# Altium PCB PCB1.PcbDoc
Units mm, origin at the board's own origin, x right, y up, seen from the top; angles counter-clockwise.
Board outline 15 x 21 mm, 2 copper layers (Top Layer, Bottom Layer); 2 components, 5 nets, 16 pads, 0 vias.
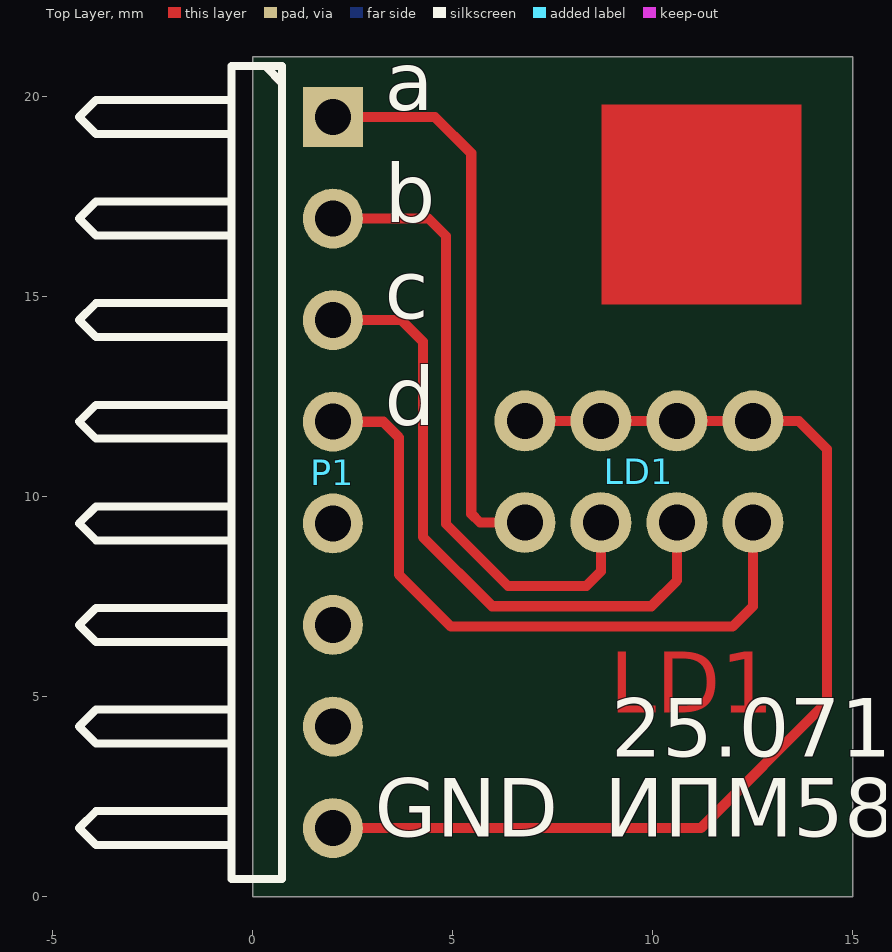
[diagram p0: Top Layer view]
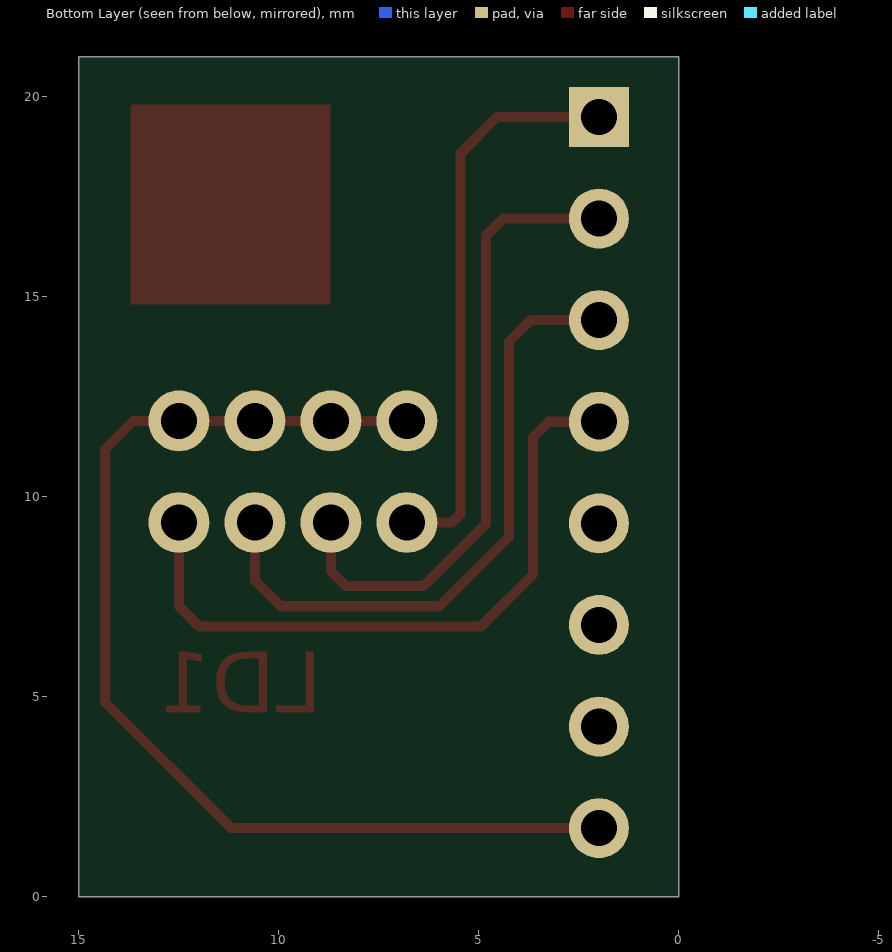
[diagram p1: Bottom Layer view, seen from below]

## Layer stack, top to bottom
Top Solder: solder mask 0.0102, Solder Resist, Dk 3.5
Top Layer: signal copper 0.0356
Dielectric 1: dielectric 0.32, FR-4, Dk 4.8
Bottom Layer: signal copper 0.0356
Bottom Solder: solder mask 0.0102, Solder Resist, Dk 3.5

## Board outline
0,0 0,21 15,21 15,0

## Design rules (kind name [scope] priority, off if disabled: settings)
Clearance [All] p1: gap=0.254 ignorepadtopadclearanceinfootprint=FALSE except(0: Arc-Hole Track-Hole SMDPad-Hole THPad-Hole Via-Hole Fill-Hole Poly-Hole Region-Hole Text-Hole)
PolygonConnect [All] p1: connectstyle=Relief reliefconductorwidth=0.254 reliefentries=4 polygonreliefangle="90 Angle" airgapwidth=0.254
RoutingVias [All] p1: holewidth=0.711 width=1.27 viastyle="Through Hole" minholewidth=0.711 minwidth=1.27 maxholewidth=0.711 maxwidth=1.27
SolderMaskExpansion [All] p1: expansion=0.102 istentingtop=FALSE
Width [All] p1: maxlimit=0.254 minlimit=0.254 preferedwidth=0.254
30 further rules are at their usual default settings.

## Classes and differential pairs
component class Sheet1: P1

## Components (designator, comment, footprint, x,y, rotation, side; value= is the part's Value field where it differs from the comment)
LD1 "LED_1" LED_1 12.5,10.63 r180 top
P1 "Header 8H" HDR1X8H 2,19.5 r270 top (schematic designator P?)

## Footprints (in the part's own frame and the unit in brackets; to place one, negate y for a bottom-side part, rotate by r counter-clockwise, add the part's x,y. Pads: shape width x height; smd on the part's side, far side on the other; paste and mask are expansions set on the pad)
HDR1X8H [mm] "Connector; Header; 8 Position; Right Angle"
  rect 1.5x1.5 hole 0.9: 1(0,0)
  round 1.5 hole 0.9: 2(2.54,0) 3(5.08,0) 4(7.62,0) 5(10.16,0) 6(12.7,0) 7(15.24,0) 8(17.78,0)
  silkscreen extent -1.27,-6.35 19.05,-1.27
LED_1 [mil]
  round 60 hole 35.43: 1(0,50) 2(74.8,50) 3(149.61,50) 4(224.41,50) 5(0,-50) 6(74.8,-50) 7(149.61,-50) 8(224.41,-50)

## Part data
P1: "Header, 8-Pin, Right Angle", LatestRevisionDate=17-Jul-2002, LatestRevisionNote="Re-released for DXP Platform.", Publisher="Altium Limited"

## Nets (pads, with @x,y where several pads share a name; then routed paths per layer and width w, separated by ;. In a path a pad name is that pad's centre, name@x,y a point inside that pad or via, vN(x,y) a via of type N, cw(c..) or ccw(c..) an arc to the next point about the centre after c; other vN are vias at no path point)
NetLD1_1: LD1.1 P1.4 | length 16.9
  Top Layer w0.254: P1.4 3.258,11.88 3.649,11.489 3.649,8.06 4.953,6.757 11.989,6.757 12.5,7.268 LD1.1
NetLD1_2: LD1.2 P1.3 | length 16.1
  Top Layer w0.254: P1.3 3.716,14.42 4.249,13.887 4.249,9 5.984,7.265 9.957,7.265 10.6,7.908 LD1.2
NetLD1_3: LD1.3 P1.2 | length 16.1
  Top Layer w0.254: P1.2 4.389,16.96 4.826,16.523 4.826,9.323 6.376,7.773 8.332,7.773 8.7,8.141 LD1.3
NetLD1_4: LD1.4 P1.1 | length 14.3
  Top Layer w0.254: P1.1 4.549,19.5 5.457,18.592 5.457,9.58 5.677,9.36 LD1.4
NetLD1_5: LD1.5 LD1.6 LD1.7 LD1.8 P1.8 | length 27.8
  Top Layer w0.254: P1.8 11.195,1.72 14.349,4.874 14.349,11.2 13.649,11.9 LD1.6 LD1.7 LD1.8
pads on no net: P1.5 P1.6 P1.7

## Other copper
Top Layer:
  rectangle: 8.716,14.812 13.716,19.812

## Silkscreen, mask and mechanical layers (free items; w line width, h text height)
Top Overlay:
  text "a" at 3.302,19.177 h2.5
  text "b" at 3.302,16.383 h2.5
  text "c" at 3.302,13.97 h2.5
  text "d" at 3.302,11.303 h2.5
  text "25.071" at 8.964,3.023 h2.5
  text "GND" at 3.048,1.016 h2.5
  text "ИПМ58" at 8.788,1.016 h2.5
Mechanical 1:
  the board outline again, w0.254